# EAGLE board dendHub (EAGLE 9.6.2)
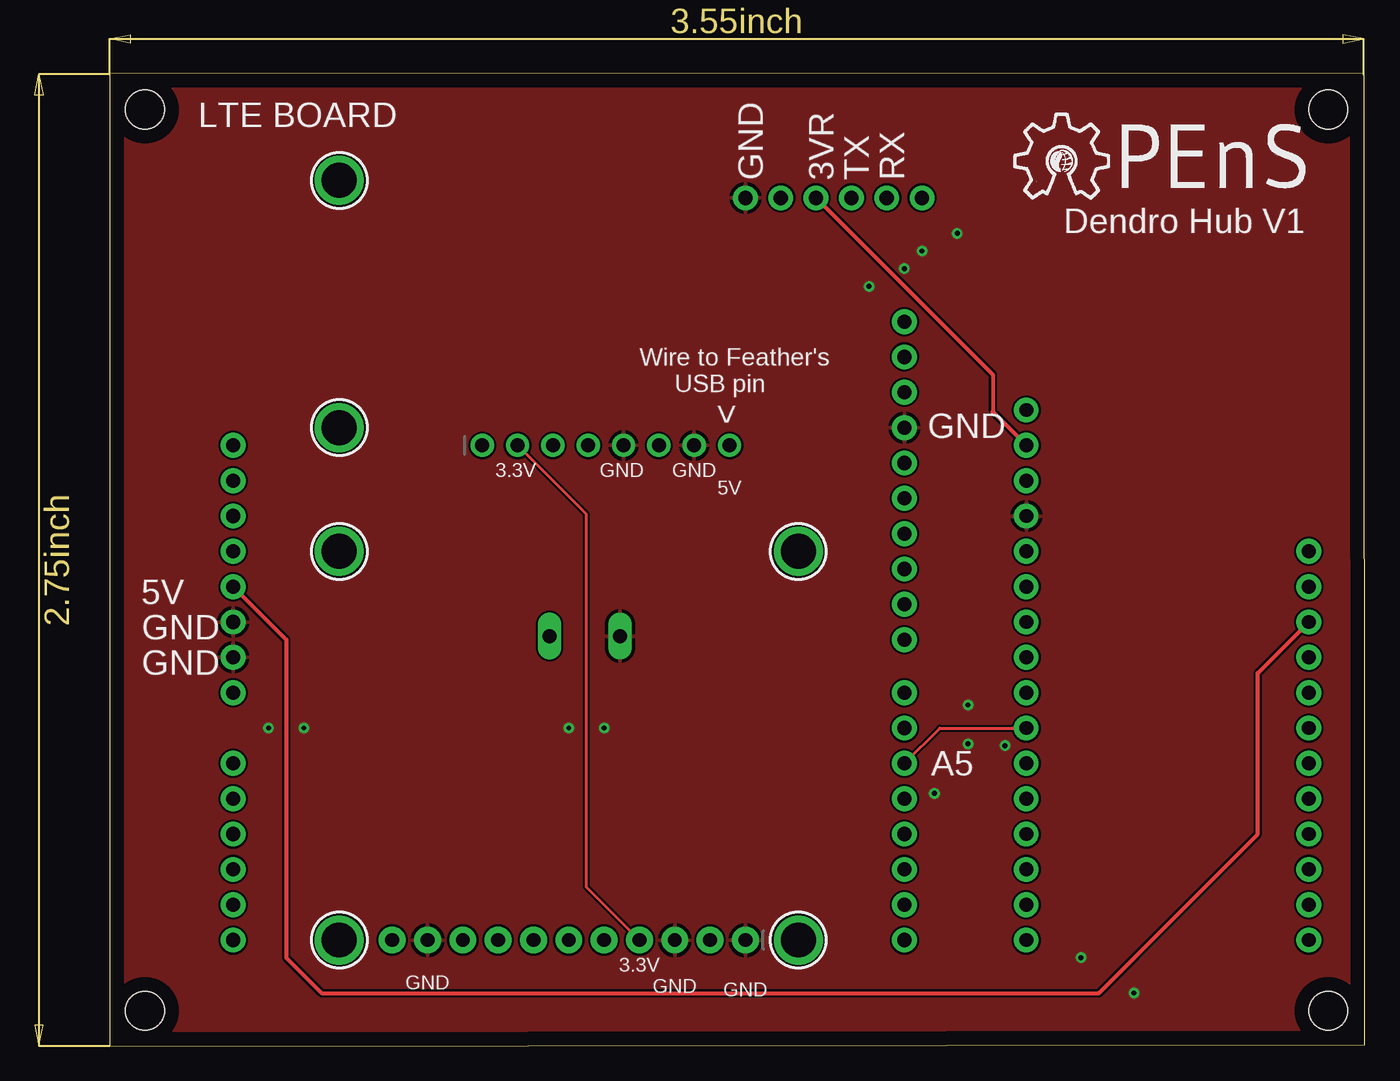
[diagram p0: board, top side]
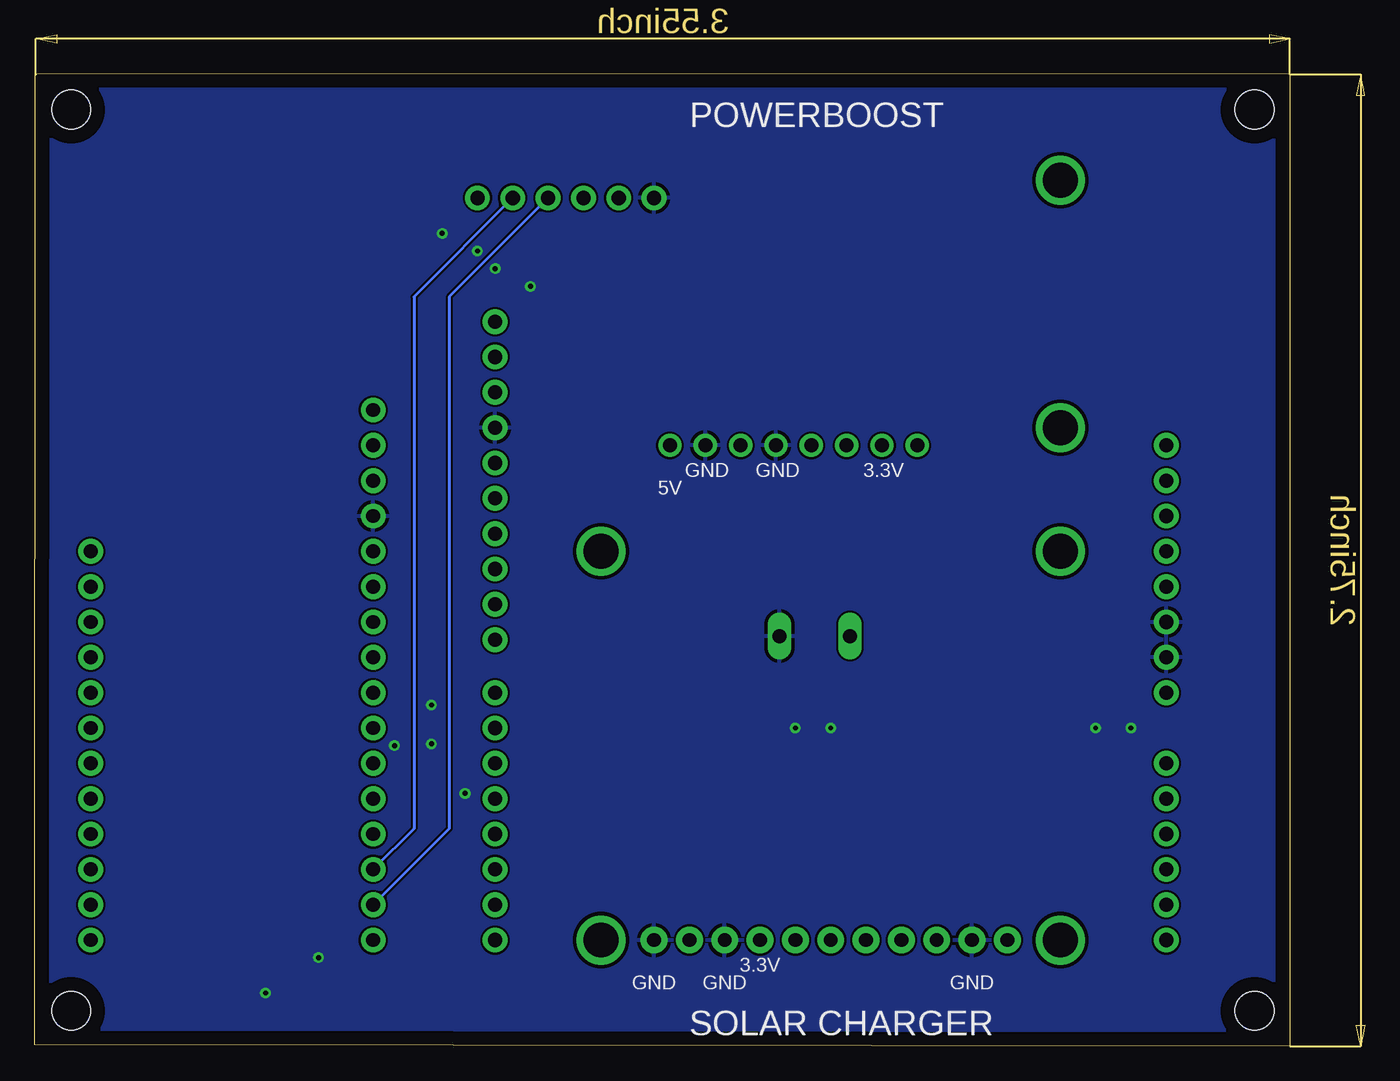
[diagram p1: board, bottom side, seen from below]

Size 90.25 x 69.93 mm. Coordinates in mm from the lower left corner, seen from the top.
Outline: 0,0 90.25,0.08 90.2,69.93 0,69.9 0,0
Copper layers (1*16): Top 0.035mm / dielectric 1.5mm / Bottom 0.035mm
Design rules "default": minimum track width 6mil, minimum drill 0.35mm, track to track 6mil, track to pad 6mil, pad to pad 6mil, via to via 6mil, smd to smd 6mil, copper to edge 40mil, drill to drill 6mil, minimum pad ring 10mil, minimum via ring 8mil, stop-mask expansion 4mil, vias tented up to drill 0mil, thermal gap 10mil
Net classes: 1 USB_Data: width 0.152 mm, drill 0.305 mm, clearance 0.152 mm; 2 HIGHVOLTAGE: clearance 0.3 mm
Holes 2.8 mm at 87.63,2.54 87.63,67.31 2.54,67.31 2.54,2.54

## Footprints (pad centres in the part's own frame; a part is rotated, then mirrored left to right if it is on the bottom)
1X08_ROUND = drill 1 pad 1.676: 1 -8.89,0; 2 -6.35,0; 3 -3.81,0; 4 -1.27,0; 5 1.27,0; 6 3.81,0; 7 6.35,0; 8 8.89,0
1X11_ROUND_76 = drill 1 pad 1.93: 1 -12.7,0; 2 -10.16,0; 3 -7.62,0; 4 -5.08,0; 5 -2.54,0; 6 0,0; 7 2.54,0; 8 5.08,0; 9 7.62,0; 10 10.16,0; 11 12.7,0
1X01_OVAL = drill 1 pad 1.676 long: 1 0,0
FEATHERWING = drill 1 pad 1.778: 1 6.35,1.27; 2 8.89,1.27; 3 11.43,1.27; 4 13.97,1.27; 5 16.51,1.27; 6 19.05,1.27; 7 21.59,1.27; 8 24.13,1.27; 9 26.67,1.27; 10 29.21,1.27; 11 31.75,1.27; 12 34.29,1.27; 13 36.83,1.27; 14 39.37,1.27; 15 41.91,1.27; 16 44.45,1.27; 17 44.45,21.59; 18 41.91,21.59; 19 39.37,21.59; 20 36.83,21.59; 21 34.29,21.59; 22 31.75,21.59; 23 29.21,21.59; 24 26.67,21.59; 25 24.13,21.59; 26 21.59,21.59; 27 19.05,21.59; 28 16.51,21.59
LTE_BOARD_FOOTPRINT = drill 1.016 pad 1.778: 0 35.56,48.26; 1 33.02,48.26; 2 30.48,48.26; 3 27.94,48.26; 3.3V 7.62,0; 4 25.4,48.26; 5 22.86,48.26; 5V 10.16,0; 6 20.32,48.26; 7 17.78,48.26; 8 13.97,48.26; 9 11.43,48.26; 10 8.89,48.26; 11 6.35,48.26; 12 3.81,48.26; 13 1.27,48.26; A0 22.86,0; A1 25.4,0; A2 27.94,0; A3 30.48,0; A4 33.02,0; A5 35.56,0; AREF -3.81,48.26; BLANK 0,0; GND 15.24,0; GND1 12.7,0; GND2 -17.78,36.83; GND3 -1.27,48.26; IOREF 2.54,0; NC -17.78,49.53; NC1 -17.78,39.37; RST 5.08,0; RX -17.78,44.45; SCL -8.89,48.26; SDA -6.35,48.26; TX -17.78,46.99; VIN 17.78,0; VIO -17.78,41.91
MOUNTINGHOLE_2.5_PLATED = drill 2.5 pad 3.2: P$1 0,0

## Placement (x,y rotation side)
JP1  [1X08_ROUND]  35.69,43.18 0 top
JP9  [1X11_ROUND_76]  33.02,7.62 180 top
JP11  [1X01_OVAL]  36.7,29.46 0 top
JP12  [1X01_OVAL]  31.62,29.46 0 top
MS1  FEATHERWING  [FEATHERWING]  64.64,52.07 270 top
U$1  LTE_BOARD  [LTE_BOARD_FOOTPRINT]  8.89,43.18 270 top
U$2  [OPENS-LOGO]  64.77,57.15 0 top
U$45  MOUNTINGHOLE2.5  [MOUNTINGHOLE_2.5_PLATED]  16.51,7.62 0 top
U$46  MOUNTINGHOLE2.5  [MOUNTINGHOLE_2.5_PLATED]  16.51,35.56 0 top
U$47  MOUNTINGHOLE2.5  [MOUNTINGHOLE_2.5_PLATED]  49.53,35.56 0 top
U$48  MOUNTINGHOLE2.5  [MOUNTINGHOLE_2.5_PLATED]  49.53,7.62 0 top
U$56  MOUNTINGHOLE2.5  [MOUNTINGHOLE_2.5_PLATED]  16.51,62.23 0 top
U$57  MOUNTINGHOLE2.5  [MOUNTINGHOLE_2.5_PLATED]  16.51,44.45 0 top

## Library data of the parts
JP1 JP9 JP11 JP12 = microbuilder
MS1 = adafruit
U$1 = LTE_BOARD
U$2 = opens-logo
U$45-U$48 U$56 U$57 = microbuilder; BOM: EXCLUDE

## Nets
3VRAIL: MS1.2 U$1.VIO
5VRAIL: MS1.26 U$1.5V
GND: JP1.5 JP1.7 JP9.1 JP9.3 JP9.10 JP11.1 MS1.4 U$1.GND U$1.GND1 U$1.GND2 U$1.GND3
N$1: JP1.8
PWR_ON: MS1.10 U$1.5
RX: MS1.14 U$1.TX
TX: MS1.15 U$1.RX
VBUS: JP12.1
VOUT: JP1.2 JP9.4

## Tracks (layer width: path | path; a pad name or v marks a point on that pad's centre or on a via)
3VRAIL
  Top 0.305: U$1.VIO 63.5,48.26 63.5,45.59 MS1.2
5VRAIL
  Top 0.305: U$1.5V 12.7,29.21 12.7,6.35 15.24,3.81 71.12,3.81 82.55,15.24 82.55,26.8 MS1.26
GND  (via drill 0.35)
  other vias: 11.43,22.86 13.97,22.86 33.02,22.86 35.56,22.86 69.85,6.35 73.66,3.81 59.31,18.16 61.72,21.72 64.39,21.59 54.61,54.61 60.96,58.42 58.42,57.15 57.15,55.88 61.72,24.51
  pour Top: 0,0 0,69.85 90.17,69.85 90.17,0
  pour Bottom: 0,0 0,69.85 90.17,69.85 90.17,0
PWR_ON
  Top 0.203: U$1.5 59.69,22.86 MS1.10
RX
  Bottom 0.203: U$1.TX 62.99,53.85 62.99,15.62 MS1.14
TX
  Bottom 0.203: U$1.RX 60.45,53.85 60.45,15.62 MS1.15
VOUT
  Top 0.203: JP9.4 34.29,11.43 34.29,38.23 JP1.2

## Text on the board
tPlace: GND | 3VR | TX | RX | Wire to Feather's / USB pin | < | GND | 3.3V | GND | GND | 5V | 5V | GND | GND | A5 | 3.3V | GND | GND | GND
bPlace: 3.3V | GND | GND | 5V | 3.3V | GND | GND | GND
tNames: LTE BOARD | Dendro Hub V1
bNames: POWERBOOST | SOLAR CHARGER
bStop: Hypnos V3.1 | Hypnos V3.1
Measures: Units in inches | Units in inches